# EAGLE board Vernier_Interface_Shield-Panel-v12 (EAGLE 6.6.0)
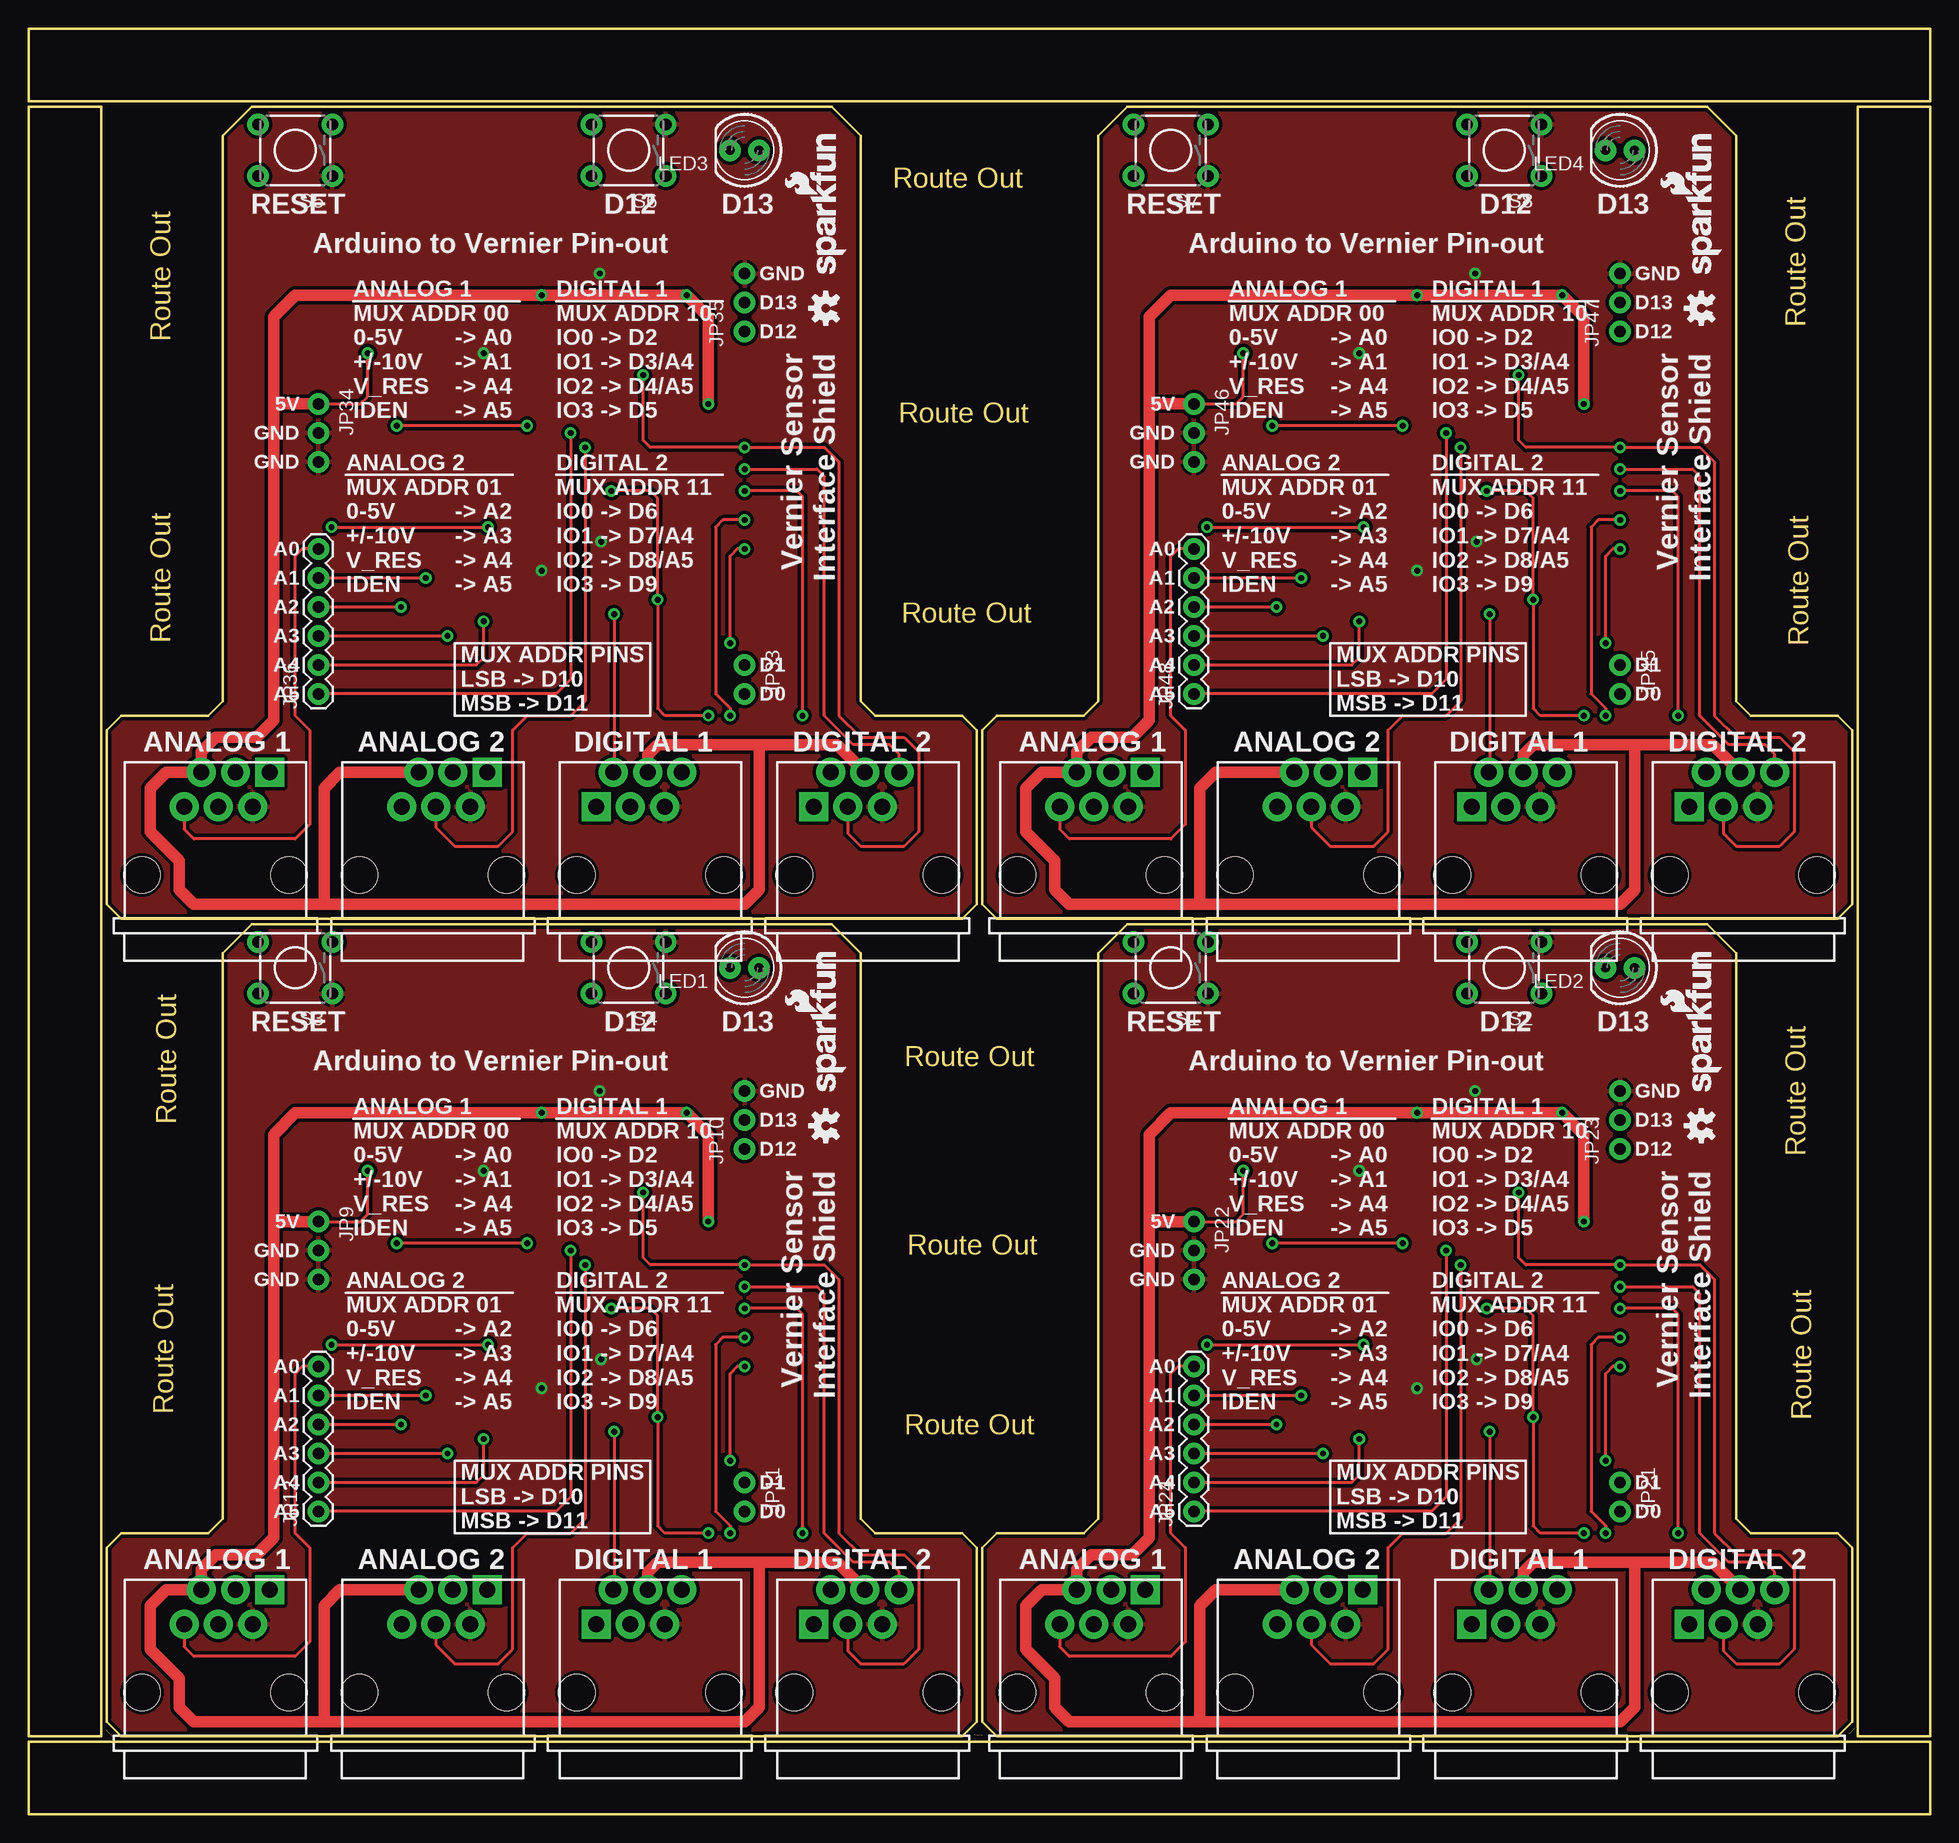
[diagram p0: board, top side]
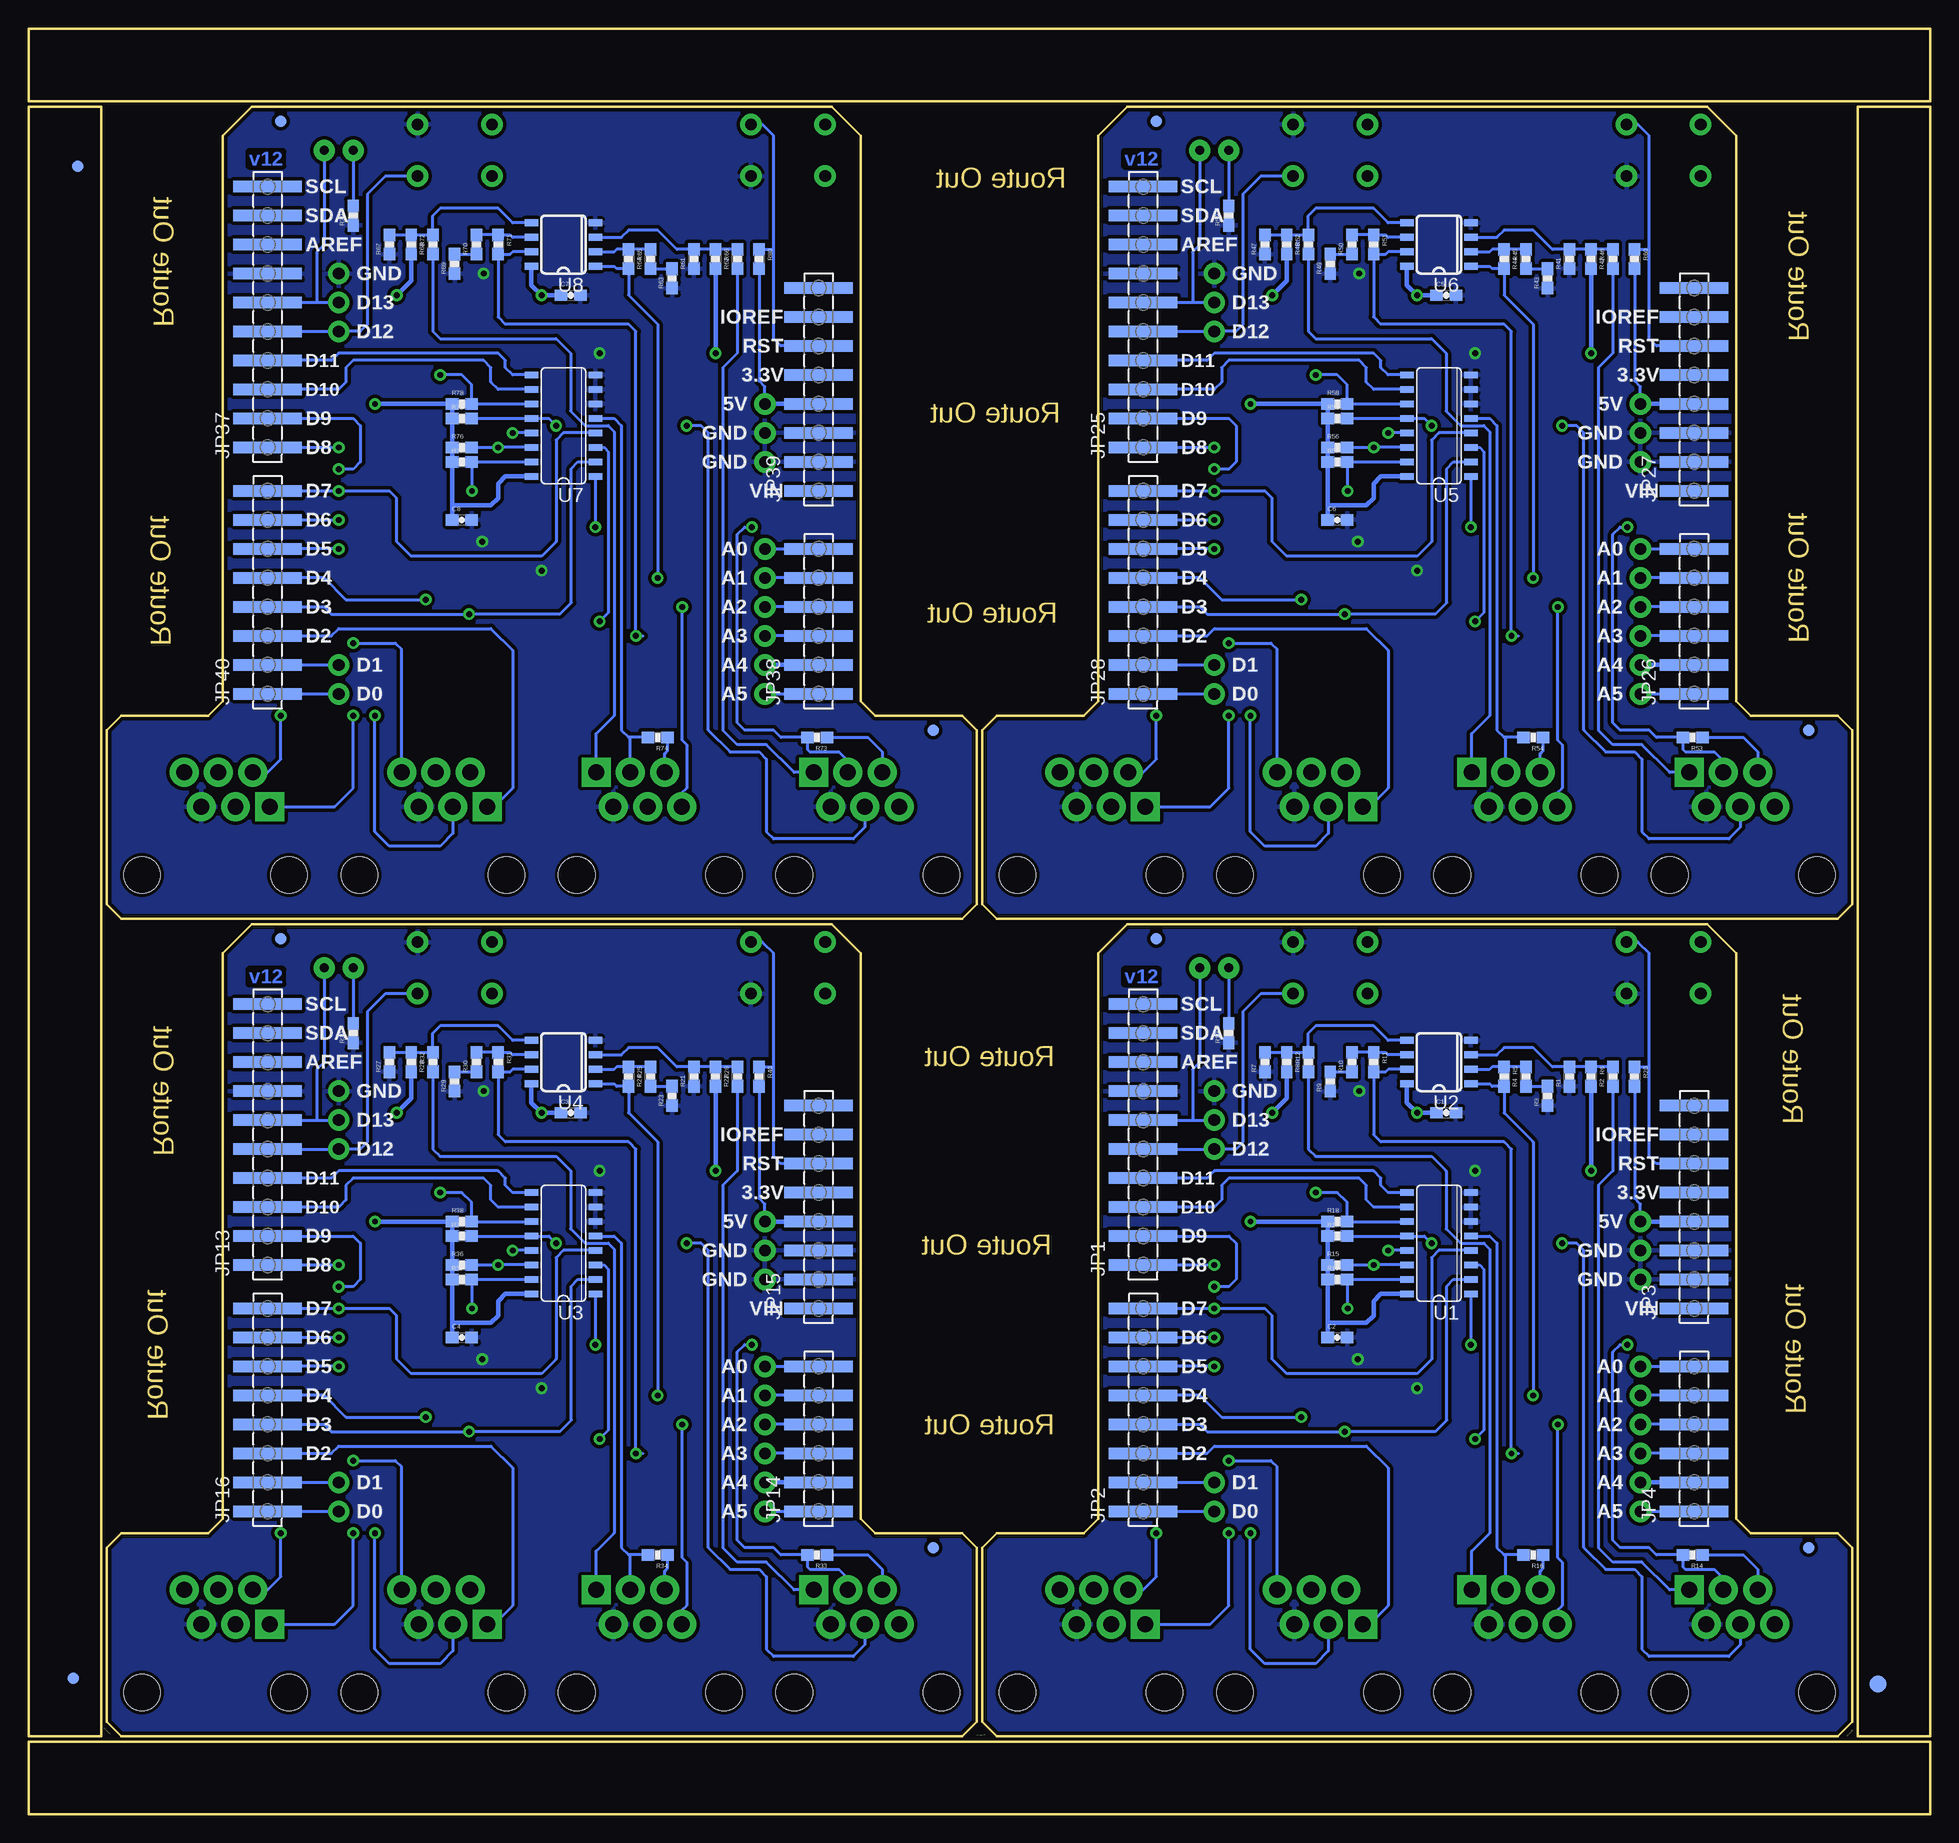
[diagram p1: board, bottom side, seen from below]

Size 166.62 x 156.46 mm. Coordinates in mm from the lower left corner, seen from the top.
Outline: 6.35,79.25 6.35,6.86 0,6.86 0,29.72
Outline: 166.62,79.25 166.62,6.86 160.27,6.86 160.27,29.72
Outline: 0,25.65 0,149.61 6.35,149.61 6.35,75.18
Outline: 160.27,25.4 160.27,149.61 166.62,149.61 166.62,74.93
Outline: 8.13,6.86 81.79,6.86 83.06,8.13 83.06,23.37 81.79,24.64 74.17,24.64 72.9,25.91 72.9,75.44 70.36,77.98 19.56,77.98 17.02,75.44 17.02,25.91 15.75,24.64 8.13,24.64 6.86,23.37 6.86,8.13 8.13,6.86
Outline: 84.84,6.86 158.5,6.86 159.77,8.13 159.77,23.37 158.5,24.64 150.88,24.64 149.61,25.91 149.61,75.44 147.07,77.98 96.27,77.98 93.73,75.44 93.73,25.91 92.46,24.64 84.84,24.64 83.57,23.37 83.57,8.13 84.84,6.86
Outline: 8.13,78.49 81.79,78.49 83.06,79.76 83.06,95 81.79,96.27 74.17,96.27 72.9,97.54 72.9,147.07 70.36,149.61 19.56,149.61 17.02,147.07 17.02,97.54 15.75,96.27 8.13,96.27 6.86,95 6.86,79.76 8.13,78.49
Outline: 84.84,78.49 158.5,78.49 159.77,79.76 159.77,95 158.5,96.27 150.88,96.27 149.61,97.54 149.61,147.07 147.07,149.61 96.27,149.61 93.73,147.07 93.73,97.54 92.46,96.27 84.84,96.27 83.57,95 83.57,79.76 84.84,78.49
Outline: 0,0 166.62,0 166.62,6.35 0,6.35 0,0
Outline: 0,156.46 0,150.11 166.62,150.11 166.62,156.46 0,156.46
Copper layers (1*16): Top 0.035mm / dielectric 1.5mm / Bottom 0.035mm
Design rules "SparkFun-2-layer": minimum track width 7mil, minimum drill 15mil, track to track 8mil, track to pad 8mil, pad to pad 8mil, via to via 8mil, smd to smd 8mil, copper to edge 8mil, drill to drill 8mil, minimum pad ring 12mil, minimum via ring 10mil, stop-mask expansion 4mil, vias tented up to drill 20mil, thermal gap 10mil

## Footprints (pad centres in the part's own frame; a part is rotated, then mirrored left to right if it is on the bottom)
0603-CAP = smd 1.1 x 1: 1 -0.85,0; 2 0.85,0
FIDUCIAL-1.5X3 = smd 1.5 x 1.5: 1 0,0
FIDUCIAL-1X2 = smd 1 x 1: 1 0,0
1X10_SMD_MALE = smd 1.02 x 6: 1 0,0; 2 2.54,0; 3 5.08,0; 4 7.62,0; 5 10.16,0; 6 12.7,0; 7 15.24,0; 8 17.78,0; 9 20.32,0; 10 22.86,0
1X08_SMD_MALE = smd 1.02 x 6: 1 0,0; 2 2.54,0; 3 5.08,0; 4 7.62,0; 5 10.16,0; 6 12.7,0; 7 15.24,0; 8 17.78,0
1X06_SMD_MALE = smd 1.02 x 6: 1 0,0; 2 2.54,0; 3 5.08,0; 4 7.62,0; 5 10.16,0; 6 12.7,0
BTA = drill 1.4 pad 2.54 square: 1 4.75,9 | drill 1.4 pad 2.54: 2 3.25,6; 3 1.75,9; 4 0.25,6; 5 -1.25,9; 6 -2.75,6 | hole 3.2: 6.45,0; -6.45,0
BTD = drill 1.4 pad 2.54 square: 1 -4.75,6 | drill 1.4 pad 2.54: 2 -3.25,9; 3 -1.75,6; 4 -0.25,9; 5 1.25,6; 6 2.75,9 | hole 3.2: 6.45,0; -6.45,0
1X03_NO_SILK = drill 1.016 pad 1.88: 1 0,0; 2 2.54,0; 3 5.08,0
1X02_NO_SILK = drill 1.016 pad 1.88: 1 0,0; 2 2.54,0
1X06 = drill 1.016 pad 1.88: 1 0,0; 2 2.54,0; 3 5.08,0; 4 7.62,0; 5 10.16,0; 6 12.7,0
LED5MM = drill 0.813 pad 1.88: A -1.27,0; K 1.27,0
0603-RES = smd 1.1 x 1: 1 -0.85,0; 2 0.85,0
TACTILE-PTH = drill 1.016 pad 1.88: 1 -3.251,2.261; 2 3.251,2.261; 3 -3.251,-2.261; 4 3.251,-2.261
SO16 = smd 0.6 x 1.2: 1 -4.445,-2.8; 2 -3.175,-2.8; 3 -1.905,-2.8; 4 -0.635,-2.8; 5 0.635,-2.8; 6 1.905,-2.8; 7 3.175,-2.8; 8 4.445,-2.8; 9 4.445,2.8; 10 3.175,2.8; 11 1.905,2.8; 12 0.635,2.8; 13 -0.635,2.8; 14 -1.905,2.8; 15 -3.175,2.8; 16 -4.445,2.8
SO08-TIGHT = smd 0.6 x 1.2: 1 -1.905,-2.8; 2 -0.635,-2.8; 3 0.635,-2.8; 4 1.905,-2.8; 5 1.905,2.8; 6 0.635,2.8; 7 -0.635,2.8; 8 -1.905,2.8

## Placement (x,y rotation side)
C1  0.1uF  [0603-CAP]  42.42,61.47 0 bottom
C2  0.1uF  [0603-CAP]  51.94,41.78 0 bottom
C3  0.1uF  [0603-CAP]  119.13,61.47 0 bottom
C4  0.1uF  [0603-CAP]  128.65,41.78 0 bottom
C5  0.1uF  [0603-CAP]  42.42,133.1 0 bottom
C6  0.1uF  [0603-CAP]  51.94,113.41 0 bottom
C7  0.1uF  [0603-CAP]  119.13,133.1 0 bottom
C8  0.1uF  [0603-CAP]  128.65,113.41 0 bottom
E$1  [FIDUCIAL-1.5X3]  4.57,11.43 0 bottom
E$4  [FIDUCIAL-1X2]  162.69,11.94 0 bottom
E$6  [FIDUCIAL-1X2]  162.31,144.4 90 bottom
FID1  FIDUCIAL1X2  [FIDUCIAL-1X2]  10.67,23.37 0 bottom
FID2  FIDUCIAL1X2  [FIDUCIAL-1X2]  67.82,76.71 0 bottom
FID3  FIDUCIAL1X2  [FIDUCIAL-1X2]  87.38,23.37 0 bottom
FID4  FIDUCIAL1X2  [FIDUCIAL-1X2]  144.53,76.71 0 bottom
FID5  FIDUCIAL1X2  [FIDUCIAL-1X2]  10.67,95 0 bottom
FID6  FIDUCIAL1X2  [FIDUCIAL-1X2]  67.82,148.34 0 bottom
FID7  FIDUCIAL1X2  [FIDUCIAL-1X2]  87.38,95 0 bottom
FID8  FIDUCIAL1X2  [FIDUCIAL-1X2]  144.53,148.34 0 bottom
JP1  Male  [1X10_SMD_MALE]  68.96,48.13 90 bottom
JP2  Male  [1X08_SMD_MALE]  68.96,26.54 90 bottom
JP3  Male  [1X08_SMD_MALE]  20.7,44.32 90 bottom
JP4  Male  [1X06_SMD_MALE]  20.7,26.54 90 bottom
JP5  BTA  [BTA]  16.38,10.67 0 top
JP6  BTA  [BTA]  35.43,10.67 0 top
JP7  BTD  [BTD]  54.48,10.67 0 top
JP8  BTD  [BTD]  73.53,10.67 0 top
JP9  [1X03_NO_SILK]  25.4,51.94 270 top
JP10  [1X03_NO_SILK]  62.74,58.29 90 top
JP11  M021X02_NO_SILK  [1X02_NO_SILK]  62.74,29.08 270 top
JP12  Male  [1X06]  25.4,26.54 90 top
JP13  Male  [1X10_SMD_MALE]  145.67,48.13 90 bottom
JP14  Male  [1X06_SMD_MALE]  97.41,26.54 90 bottom
JP15  Male  [1X08_SMD_MALE]  97.41,44.32 90 bottom
JP16  Male  [1X08_SMD_MALE]  145.67,26.54 90 bottom
JP17  BTD  [BTD]  131.19,10.67 0 top
JP18  BTA  [BTA]  93.09,10.67 0 top
JP19  BTA  [BTA]  112.14,10.67 0 top
JP20  BTD  [BTD]  150.24,10.67 0 top
JP21  M021X02_NO_SILK  [1X02_NO_SILK]  139.45,29.08 270 top
JP22  [1X03_NO_SILK]  102.11,51.94 270 top
JP23  [1X03_NO_SILK]  139.45,58.29 90 top
JP24  Male  [1X06]  102.11,26.54 90 top
JP25  Male  [1X10_SMD_MALE]  68.96,119.76 90 bottom
JP26  Male  [1X06_SMD_MALE]  20.7,98.17 90 bottom
JP27  Male  [1X08_SMD_MALE]  20.7,115.95 90 bottom
JP28  Male  [1X08_SMD_MALE]  68.96,98.17 90 bottom
JP29  BTD  [BTD]  54.48,82.3 0 top
JP30  BTA  [BTA]  16.38,82.3 0 top
JP31  BTA  [BTA]  35.43,82.3 0 top
JP32  BTD  [BTD]  73.53,82.3 0 top
JP33  M021X02_NO_SILK  [1X02_NO_SILK]  62.74,100.71 270 top
JP34  [1X03_NO_SILK]  25.4,123.57 270 top
JP35  [1X03_NO_SILK]  62.74,129.92 90 top
JP36  Male  [1X06]  25.4,98.17 90 top
JP37  Male  [1X10_SMD_MALE]  145.67,119.76 90 bottom
JP38  Male  [1X06_SMD_MALE]  97.41,98.17 90 bottom
JP39  Male  [1X08_SMD_MALE]  97.41,115.95 90 bottom
JP40  Male  [1X08_SMD_MALE]  145.67,98.17 90 bottom
JP41  BTD  [BTD]  131.19,82.3 0 top
JP42  BTA  [BTA]  93.09,82.3 0 top
JP43  BTA  [BTA]  112.14,82.3 0 top
JP44  BTD  [BTD]  150.24,82.3 0 top
JP45  M021X02_NO_SILK  [1X02_NO_SILK]  139.45,100.71 270 top
JP46  [1X03_NO_SILK]  102.11,123.57 270 top
JP47  [1X03_NO_SILK]  139.45,129.92 90 top
JP48  Male  [1X06]  102.11,98.17 90 top
LED1  [LED5MM]  62.74,74.17 180 top
LED2  [LED5MM]  139.45,74.17 180 top
LED3  [LED5MM]  62.74,145.8 180 top
LED4  [LED5MM]  139.45,145.8 180 top
LOGO1  OSHW-LOGOS  [OSHW-LOGO-S]  146.56,60.33 90 top
LOGO2  OSHW-LOGOS  [OSHW-LOGO-S]  69.85,60.33 90 top
LOGO3  OSHW-LOGOS  [OSHW-LOGO-S]  69.85,131.95 90 top
LOGO4  OSHW-LOGOS  [OSHW-LOGO-S]  146.56,131.95 90 top
LOGO_1  LOGO-SFESK  [SFE-LOGO-FLAME]  69.09,70.36 90 top
LOGO_2  LOGO-SFENW2  [SFE-NEW-WEB]  148.34,63.37 90 top
LOGO_3  LOGO-SFENW2  [SFE-NEW-WEB]  71.63,63.37 90 top
LOGO_4  LOGO-SFESK  [SFE-LOGO-FLAME]  145.8,70.36 90 top
LOGO_5  LOGO-SFENW2  [SFE-NEW-WEB]  71.63,135 90 top
LOGO_6  LOGO-SFESK  [SFE-LOGO-FLAME]  69.09,141.99 90 top
LOGO_7  LOGO-SFENW2  [SFE-NEW-WEB]  148.34,135 90 top
LOGO_8  LOGO-SFESK  [SFE-LOGO-FLAME]  145.8,141.99 90 top
R1  10K  [0603-RES]  31.62,64.64 90 bottom
R2  20k  [0603-RES]  27.81,64.64 90 bottom
R3  20k  [0603-RES]  33.53,62.94 90 bottom
R4  20k  [0603-RES]  35.43,64.64 90 bottom
R5  10K  [0603-RES]  37.34,64.64 270 bottom
R6  10K  [0603-RES]  29.72,64.64 270 bottom
R7  10K  [0603-RES]  58.29,65.91 90 bottom
R8  20k  [0603-RES]  54.48,65.91 90 bottom
R9  20k  [0603-RES]  52.58,64.21 90 bottom
R10  20k  [0603-RES]  50.67,65.91 90 bottom
R11  10K  [0603-RES]  48.77,65.91 270 bottom
R12  10K  [0603-RES]  56.39,65.91 270 bottom
R13  10K  [0603-RES]  51.94,50.67 0 bottom
R14  15K  [0603-RES]  20.83,22.73 180 bottom
R15  10K  [0603-RES]  51.94,48.13 0 bottom
R16  15K  [0603-RES]  34.8,22.73 180 bottom
R17  10K  [0603-RES]  51.94,46.86 0 bottom
R18  10K  [0603-RES]  51.94,51.94 0 bottom
R19  330  [0603-RES]  61.47,68.45 90 bottom
R20  10K  [0603-RES]  25.91,64.64 270 bottom
R21  10K  [0603-RES]  108.33,64.64 90 bottom
R22  20k  [0603-RES]  104.52,64.64 90 bottom
R23  20k  [0603-RES]  110.24,62.94 90 bottom
R24  20k  [0603-RES]  112.14,64.64 90 bottom
R25  10K  [0603-RES]  114.05,64.64 270 bottom
R26  10K  [0603-RES]  106.43,64.64 270 bottom
R27  10K  [0603-RES]  135,65.91 90 bottom
R28  20k  [0603-RES]  131.19,65.91 90 bottom
R29  20k  [0603-RES]  129.29,64.21 90 bottom
R30  20k  [0603-RES]  127.38,65.91 90 bottom
R31  10K  [0603-RES]  125.48,65.91 270 bottom
R32  10K  [0603-RES]  133.1,65.91 270 bottom
R33  15K  [0603-RES]  97.54,22.73 180 bottom
R34  15K  [0603-RES]  111.51,22.73 180 bottom
R35  10K  [0603-RES]  128.65,50.67 0 bottom
R36  10K  [0603-RES]  128.65,48.13 0 bottom
R37  10K  [0603-RES]  128.65,46.86 0 bottom
R38  10K  [0603-RES]  128.65,51.94 0 bottom
R39  330  [0603-RES]  138.18,68.45 90 bottom
R40  10K  [0603-RES]  102.62,64.64 270 bottom
R41  10K  [0603-RES]  31.62,136.27 90 bottom
R42  20k  [0603-RES]  27.81,136.27 90 bottom
R43  20k  [0603-RES]  33.53,134.57 90 bottom
R44  20k  [0603-RES]  35.43,136.27 90 bottom
R45  10K  [0603-RES]  37.34,136.27 270 bottom
R46  10K  [0603-RES]  29.72,136.27 270 bottom
R47  10K  [0603-RES]  58.29,137.54 90 bottom
R48  20k  [0603-RES]  54.48,137.54 90 bottom
R49  20k  [0603-RES]  52.58,135.84 90 bottom
R50  20k  [0603-RES]  50.67,137.54 90 bottom
R51  10K  [0603-RES]  48.77,137.54 270 bottom
R52  10K  [0603-RES]  56.39,137.54 270 bottom
R53  15K  [0603-RES]  20.83,94.36 180 bottom
R54  15K  [0603-RES]  34.8,94.36 180 bottom
R55  10K  [0603-RES]  51.94,122.3 0 bottom
R56  10K  [0603-RES]  51.94,119.76 0 bottom
R57  10K  [0603-RES]  51.94,118.49 0 bottom
R58  10K  [0603-RES]  51.94,123.57 0 bottom
R59  330  [0603-RES]  61.47,140.08 90 bottom
R60  10K  [0603-RES]  25.91,136.27 270 bottom
R61  10K  [0603-RES]  108.33,136.27 90 bottom
R62  20k  [0603-RES]  104.52,136.27 90 bottom
R63  20k  [0603-RES]  110.24,134.57 90 bottom
R64  20k  [0603-RES]  112.14,136.27 90 bottom
R65  10K  [0603-RES]  114.05,136.27 270 bottom
R66  10K  [0603-RES]  106.43,136.27 270 bottom
R67  10K  [0603-RES]  135,137.54 90 bottom
R68  20k  [0603-RES]  131.19,137.54 90 bottom
R69  20k  [0603-RES]  129.29,135.84 90 bottom
R70  20k  [0603-RES]  127.38,137.54 90 bottom
R71  10K  [0603-RES]  125.48,137.54 270 bottom
R72  10K  [0603-RES]  133.1,137.54 270 bottom
R73  15K  [0603-RES]  97.54,94.36 180 bottom
R74  15K  [0603-RES]  111.51,94.36 180 bottom
R75  10K  [0603-RES]  128.65,122.3 0 bottom
R76  10K  [0603-RES]  128.65,119.76 0 bottom
R77  10K  [0603-RES]  128.65,118.49 0 bottom
R78  10K  [0603-RES]  128.65,123.57 0 bottom
R79  330  [0603-RES]  138.18,140.08 90 bottom
R80  10K  [0603-RES]  102.62,136.27 270 bottom
S1  Reset  [TACTILE-PTH]  100.08,74.17 180 top
S2  D12  [TACTILE-PTH]  129.29,74.17 180 top
S3  Reset  [TACTILE-PTH]  23.37,74.17 180 top
S4  D12  [TACTILE-PTH]  52.58,74.17 180 top
S5  Reset  [TACTILE-PTH]  23.37,145.8 180 top
S6  D12  [TACTILE-PTH]  52.58,145.8 180 top
S7  Reset  [TACTILE-PTH]  100.08,145.8 180 top
S8  D12  [TACTILE-PTH]  129.29,145.8 180 top
U1  74HC4052SO  [SO16]  43.05,50.04 90 bottom
U2  LMV358SOICT  [SO08-TIGHT]  43.05,65.91 90 bottom
U3  74HC4052SO  [SO16]  119.76,50.04 90 bottom
U4  LMV358SOICT  [SO08-TIGHT]  119.76,65.91 90 bottom
U5  74HC4052SO  [SO16]  43.05,121.67 90 bottom
U6  LMV358SOICT  [SO08-TIGHT]  43.05,137.54 90 bottom
U7  74HC4052SO  [SO16]  119.76,121.67 90 bottom
U8  LMV358SOICT  [SO08-TIGHT]  119.76,137.54 90 bottom

## Library data of the parts
C1-C8 = SparkFun-Capacitors; PROD_ID: CAP-00810
E$1 = SparkFun-Retired
E$4 E$6 FID1-FID8 LOGO1-LOGO4 LOGO_1-LOGO_8 = SparkFun-Aesthetics
JP1 JP13 JP25 JP37 = SparkFun-Connectors; PROD_ID: CONN-11291
JP2 JP3 JP15 JP16 JP27 JP28 JP39 JP40 = SparkFun-Connectors; PROD_ID: CONN-11292
JP4 JP14 JP26 JP38 = SparkFun-Connectors; PROD_ID: CONN-11293
JP5-JP12 JP17-JP24 JP29-JP36 JP41-JP48 = SparkFun-Connectors
LED1-LED4 = SparkFun-LED
R1 R5-R7 R11-R13 R15 R17 R18 R20 R21 R25-R27 R31 R32 R35-R38 R40 R41 R45-R47 R51 R52 R55-R58 R60 R61 R65-R67 R71 R72 R75-R78 R80 = SparkFun-Resistors; PROD_ID: RES-00824
R2-R4 R8-R10 R22-R24 R28-R30 R42-R44 R48-R50 R62-R64 R68-R70 = SparkFun-Resistors; PROD_ID: RES-09383
R14 R16 R33 R34 R53 R54 R73 R74 = SparkFun-Resistors; PROD_ID: RES-07854
R19 R39 R59 R79 = SparkFun-Resistors; PROD_ID: RES-00818
S1-S8 = SparkFun-Electromechanical
U1 U3 U5 U7 = SparkFun-AnalogIC; PROD_ID: IC-09813
U2 U4 U6 U8 = SparkFun-AnalogIC; PROD_ID: IC-09657

## Nets
0: JP2.1 JP11.2
1: JP2.2 JP11.1
2: JP13.5 JP23.1 S2.1
3: JP16.1 JP21.2
3.3V: JP3.5
3.3V1: JP15.5
3.3V2: JP27.5
3.3V3: JP39.5
4: JP16.2 JP21.1
5: JP13.6 JP23.2 LED2.A
5V: C1.1 C2.1 JP3.4 JP5.5 JP6.5 JP7.4 JP8.4 JP9.1 R6.2 R12.2 R13.1 R14.1 R15.1 R16.1 R17.1 R18.1 R20.2 U1.16 U2.8
5V1: C3.1 C4.1 JP15.4 JP17.4 JP18.5 JP19.5 JP20.4 JP22.1 R26.2 R32.2 R33.1 R34.1 R35.1 R36.1 R37.1 R38.1 R40.2 U3.16 U4.8
5V2: C5.1 C6.1 JP27.4 JP29.4 JP30.5 JP31.5 JP32.4 JP34.1 R46.2 R52.2 R53.1 R54.1 R55.1 R56.1 R57.1 R58.1 R60.2 U5.16 U6.8
5V3: C7.1 C8.1 JP39.4 JP41.4 JP42.5 JP43.5 JP44.4 JP46.1 R66.2 R72.2 R73.1 R74.1 R75.1 R76.1 R77.1 R78.1 R80.2 U7.16 U8.8
6: JP25.5 JP35.1 S6.1
7: JP28.1 JP33.2
8: JP28.2 JP33.1
9: JP25.6 JP35.2 LED3.A
10: JP37.5 JP47.1 S8.1
11: JP40.1 JP45.2
12: JP1.5 JP10.1 S4.1
13: JP1.6 JP10.2 LED1.A
14: JP40.2 JP45.1
15: JP37.6 JP47.2 LED4.A
A1: JP4.5 JP12.5 R5.2 U2.1
A2: JP14.2 JP24.2 U3.3
A3: JP4.3 JP12.3 R11.2 U2.7
A4: JP4.2 JP12.2 U1.3
A5: JP4.1 JP12.1 U1.13
A6: JP14.1 JP24.1 U3.13
A7: JP14.5 JP24.5 R25.2 U4.1
A8: JP14.3 JP24.3 R31.2 U4.7
A9: JP26.2 JP36.2 U5.3
A10: JP26.1 JP36.1 U5.13
A11: JP26.5 JP36.5 R45.2 U6.1
A12: JP26.3 JP36.3 R51.2 U6.7
A13: JP38.2 JP48.2 U7.3
A14: JP38.1 JP48.1 U7.13
A15: JP38.5 JP48.5 R65.2 U8.1
A16: JP38.3 JP48.3 R71.2 U8.7
AREF: JP1.8
AREF1: JP13.8
AREF2: JP25.8
AREF3: JP37.8
AS1_AN1: JP5.1 R2.1
AS1_AN2: JP4.6 JP5.6 JP12.6
AS1_AN3: JP18.1 R22.1
AS1_AN4: JP14.6 JP18.6 JP24.6
AS1_AN5: JP30.1 R42.1
AS1_AN6: JP26.6 JP30.6 JP36.6
AS1_AN7: JP42.1 R62.1
AS1_AN8: JP38.6 JP42.6 JP48.6
AS1_AUTOID: JP5.4 R13.2 U1.12
AS1_AUTOID1: JP18.4 R35.2 U3.12
AS1_AUTOID2: JP30.4 R55.2 U5.12
AS1_AUTOID3: JP42.4 R75.2 U7.12
AS1_VRES: JP5.3 R14.2 U1.1
AS1_VRES1: JP18.3 R33.2 U3.1
AS1_VRES2: JP30.3 R53.2 U5.1
AS1_VRES3: JP42.3 R73.2 U7.1
AS2_AN1: JP6.1 R8.1
AS2_AN2: JP4.4 JP6.6 JP12.4
AS2_AN3: JP14.4 JP19.6 JP24.4
AS2_AN4: JP19.1 R28.1
AS2_AN5: JP26.4 JP31.6 JP36.4
AS2_AN6: JP31.1 R48.1
AS2_AN7: JP38.4 JP43.6 JP48.4
AS2_AN8: JP43.1 R68.1
AS2_AUTOID: JP6.4 R15.2 U1.14
AS2_AUTOID1: JP19.4 R36.2 U3.14
AS2_AUTOID2: JP31.4 R56.2 U5.14
AS2_AUTOID3: JP43.4 R76.2 U7.14
AS2_VRES: JP6.3 R16.2 U1.5
AS2_VRES1: JP19.3 R34.2 U3.5
AS2_VRES2: JP31.3 R54.2 U5.5
AS2_VRES3: JP43.3 R74.2 U7.5
D1_IO0: JP2.3 JP7.1
D1_IO1: JP2.4 JP7.2 U1.2
D1_IO2: JP2.5 JP7.3 R17.2 U1.15
D1_IO3: JP2.6 JP7.6
D1_IO4: JP16.6 JP17.6
D1_IO5: JP16.5 JP17.3 R37.2 U3.15
D1_IO6: JP16.4 JP17.2 U3.2
D1_IO7: JP16.3 JP17.1
D1_IO8: JP28.6 JP29.6
D1_IO9: JP28.5 JP29.3 R57.2 U5.15
D1_IO10: JP28.4 JP29.2 U5.2
D1_IO11: JP28.3 JP29.1
D1_IO12: JP40.6 JP41.6
D1_IO13: JP40.5 JP41.3 R77.2 U7.15
D1_IO14: JP40.4 JP41.2 U7.2
D1_IO15: JP40.3 JP41.1
D2_IO0: JP2.7 JP8.1
D2_IO1: JP2.8 JP8.2 U1.4
D2_IO2: JP1.1 JP8.3 R18.2 U1.11
D2_IO3: JP1.2 JP8.6
D2_IO4: JP13.2 JP20.6
D2_IO5: JP13.1 JP20.3 R38.2 U3.11
D2_IO6: JP16.8 JP20.2 U3.4
D2_IO7: JP16.7 JP20.1
D2_IO8: JP25.2 JP32.6
D2_IO9: JP25.1 JP32.3 R58.2 U5.11
D2_IO10: JP28.8 JP32.2 U5.4
D2_IO11: JP28.7 JP32.1
D2_IO12: JP37.2 JP44.6
D2_IO13: JP37.1 JP44.3 R78.2 U7.11
D2_IO14: JP40.8 JP44.2 U7.4
D2_IO15: JP40.7 JP44.1
GND: C1.2 C2.2 JP1.7 JP3.2 JP3.3 JP5.2 JP6.2 JP7.5 JP8.5 JP9.2 JP9.3 JP10.3 R1.1 R3.1 R7.1 R9.1 R19.1 S3.1 S4.3 U1.6 U1.7 U1.8 U2.4
GND1: C3.2 C4.2 JP13.7 JP15.2 JP15.3 JP17.5 JP18.2 JP19.2 JP20.5 JP22.2 JP22.3 JP23.3 R21.1 R23.1 R27.1 R29.1 R39.1 S1.1 S2.3 U3.6 U3.7 U3.8 U4.4
GND2: C5.2 C6.2 JP25.7 JP27.2 JP27.3 JP29.5 JP30.2 JP31.2 JP32.5 JP34.2 JP34.3 JP35.3 R41.1 R43.1 R47.1 R49.1 R59.1 S5.1 S6.3 U5.6 U5.7 U5.8 U6.4
GND3: C7.2 C8.2 JP37.7 JP39.2 JP39.3 JP41.5 JP42.2 JP43.2 JP44.5 JP46.2 JP46.3 JP47.3 R61.1 R63.1 R67.1 R69.1 R79.1 S7.1 S8.3 U7.6 U7.7 U7.8 U8.4
IOREF: JP3.7
IOREF1: JP15.7
IOREF2: JP27.7
IOREF3: JP39.7
MUX_A0: JP1.3 U1.10
MUX_A1: JP1.4 U1.9
MUX_A2: JP13.3 U3.10
MUX_A3: JP13.4 U3.9
MUX_A4: JP25.3 U5.10
MUX_A5: JP25.4 U5.9
MUX_A6: JP37.3 U7.10
MUX_A7: JP37.4 U7.9
N$1: R1.2 R2.2 R6.1 U2.3
N$2: R3.2 R4.1
N$3: R4.2 R5.1 U2.2
N$4: R23.2 R24.1
N$5: R9.2 R10.1
N$6: R7.2 R8.2 R12.1 U2.5
N$8: R10.2 R11.1 U2.6
N$9: LED1.K R19.2
N$24: R21.2 R22.2 R26.1 U4.3
N$25: R24.2 R25.1 U4.2
N$26: R29.2 R30.1
N$28: R27.2 R28.2 R32.1 U4.5
N$29: R30.2 R31.1 U4.6
N$30: LED2.K R39.2
N$31: R43.2 R44.1
N$32: R41.2 R42.2 R46.1 U6.3
N$33: R44.2 R45.1 U6.2
N$34: R49.2 R50.1
N$35: R47.2 R48.2 R52.1 U6.5
N$36: R50.2 R51.1 U6.6
N$37: LED3.K R59.2
N$38: R63.2 R64.1
N$39: R61.2 R62.2 R66.1 U8.3
N$40: R64.2 R65.1 U8.2
N$41: R69.2 R70.1
N$42: R67.2 R68.2 R72.1 U8.5
N$43: R70.2 R71.1 U8.6
N$44: LED4.K R79.2
RESET: JP3.6 R20.1 S3.3
RESET1: JP15.6 R40.1 S1.3
RESET2: JP27.6 R60.1 S5.3
RESET3: JP39.6 R80.1 S7.3
SCL: JP1.10
SCL1: JP13.10
SCL2: JP25.10
SCL3: JP37.10
SDA: JP1.9
SDA1: JP13.9
SDA2: JP25.9
SDA3: JP37.9
VIN: JP3.1
VIN1: JP15.1
VIN2: JP27.1
VIN3: JP39.1

## Tracks (layer width: path | path; a pad name or v marks a point on that pad's centre or on a via)
0
  Bottom 0.254: JP2.1 JP11.2
1
  Bottom 0.254: JP2.2 JP11.1
2
  Bottom 0.254: JP13.5 JP23.1 137.54,58.29 136.91,58.93 136.91,70.36 135.36,71.91 S2.1
3
  Bottom 0.254: JP16.1 JP21.2
4
  Bottom 0.254: JP16.2 JP21.1
5
  Bottom 0.254: JP13.6 141.35,60.83 | 141.35,60.83 JP23.2 | LED2.A 140.72,65.91 141.35,65.28 141.35,60.83
5V  (via drill 0.51)
  Top 0.254: JP9.1 29.08,51.94 29.72,52.58 v29.72,56.39
  Top 1.016: 21.46,51.94 JP9.1 | 64.01,22.1 55.12,22.1 54.23,21.21 JP7.4 | 64.01,22.1 70.85,22.1 JP8.4 | JP6.5 27.29,19.67 25.91,18.29 25.91,8.13 | 25.91,8.13 14.48,8.13 13.21,9.4 13.21,11.94 10.67,14.48 10.67,18.29 12.05,19.67 JP5.5 15.13,21.48 16.38,22.73 R14.1 21.46,24.22 21.46,51.94 | 25.91,8.13 62.74,8.13 64.01,9.4 64.01,22.1 | 21.46,51.94 21.46,59.56 23.37,61.47 v44.96,61.47 v57.66,61.47 59.56,59.56 v59.56,51.94
  Bottom 0.254: R14.1 16.38,22.73 15.13,21.48 JP5.5 | JP6.5 34.18,21.32 33.95,21.55 R16.1 | R20.2 25.91,53.98 25.4,53.47 JP9.1
  Bottom 0.406: 52.79,43.05 R17.1 R15.1 R13.1 R18.1 v59.56,51.94 | 52.79,43.05 C2.1 | U1.16 48.13,45.59 48.77,44.96 48.77,43.69 49.4,43.05 52.79,43.05 | R6.2 v29.72,56.39 | C1.1 v44.96,61.47 45.85,62.36 U2.8 | JP3.4 JP9.1 | R12.2 56.39,62.74 v57.66,61.47
5V1  (via drill 0.51)
  Top 0.254: JP22.1 105.79,51.94 106.43,52.58 v106.43,56.39
  Top 1.016: 98.17,51.94 JP22.1 | 140.72,22.1 131.83,22.1 130.94,21.21 JP17.4 | 140.72,22.1 147.56,22.1 JP20.4 | JP19.5 104,19.67 102.62,18.29 102.62,8.13 | 102.62,8.13 91.19,8.13 89.92,9.4 89.92,11.94 87.38,14.48 87.38,18.29 88.76,19.67 JP18.5 91.84,21.48 93.09,22.73 R33.1 98.17,24.22 98.17,51.94 | 102.62,8.13 139.45,8.13 140.72,9.4 140.72,22.1 | 98.17,51.94 98.17,59.56 100.08,61.47 v121.67,61.47 v134.37,61.47 136.27,59.56 v136.27,51.94
  Bottom 0.254: R33.1 93.09,22.73 91.84,21.48 JP18.5 | JP19.5 110.89,21.32 110.66,21.55 R34.1 | R40.2 102.62,53.98 102.11,53.47 JP22.1
  Bottom 0.406: 129.5,43.05 R37.1 R36.1 R35.1 R38.1 v136.27,51.94 | 129.5,43.05 C4.1 | U3.16 124.84,45.59 125.48,44.96 125.48,43.69 126.11,43.05 129.5,43.05 | R26.2 v106.43,56.39 | C3.1 v121.67,61.47 122.56,62.36 U4.8 | JP15.4 JP22.1 | R32.2 133.1,62.74 v134.37,61.47
5V2  (via drill 0.51)
  Top 0.254: JP34.1 29.08,123.57 29.72,124.21 v29.72,128.02
  Top 1.016: 21.46,123.57 JP34.1 | 64.01,93.73 55.12,93.73 54.23,92.84 JP29.4 | 64.01,93.73 70.85,93.73 JP32.4 | JP31.5 27.29,91.3 25.91,89.92 25.91,79.76 | 25.91,79.76 14.48,79.76 13.21,81.03 13.21,83.57 10.67,86.11 10.67,89.92 12.05,91.3 JP30.5 15.13,93.11 16.38,94.36 R53.1 21.46,95.85 21.46,123.57 | 25.91,79.76 62.74,79.76 64.01,81.03 64.01,93.73 | 21.46,123.57 21.46,131.19 23.37,133.1 v44.96,133.1 v57.66,133.1 59.56,131.19 v59.56,123.57
  Bottom 0.254: R53.1 16.38,94.36 15.13,93.11 JP30.5 | JP31.5 34.18,92.94 33.95,93.18 R54.1 | R60.2 25.91,125.6 25.4,125.09 JP34.1
  Bottom 0.406: 52.79,114.68 R57.1 R56.1 R55.1 R58.1 v59.56,123.57 | 52.79,114.68 C6.1 | U5.16 48.13,117.22 48.77,116.59 48.77,115.32 49.4,114.68 52.79,114.68 | R46.2 v29.72,128.02 | C5.1 v44.96,133.1 45.85,133.99 U6.8 | JP27.4 JP34.1 | R52.2 56.39,134.37 v57.66,133.1
5V3  (via drill 0.51)
  Top 0.254: JP46.1 105.79,123.57 106.43,124.21 v106.43,128.02
  Top 1.016: 98.17,123.57 JP46.1 | 140.72,93.73 131.83,93.73 130.94,92.84 JP41.4 | 140.72,93.73 147.56,93.73 JP44.4 | JP43.5 104,91.3 102.62,89.92 102.62,79.76 | 102.62,79.76 91.19,79.76 89.92,81.03 89.92,83.57 87.38,86.11 87.38,89.92 88.76,91.3 JP42.5 91.84,93.11 93.09,94.36 R73.1 98.17,95.85 98.17,123.57 | 102.62,79.76 139.45,79.76 140.72,81.03 140.72,93.73 | 98.17,123.57 98.17,131.19 100.08,133.1 v121.67,133.1 v134.37,133.1 136.27,131.19 v136.27,123.57
  Bottom 0.254: R73.1 93.09,94.36 91.84,93.11 JP42.5 | JP43.5 110.89,92.94 110.66,93.18 R74.1 | R80.2 102.62,125.6 102.11,125.09 JP46.1
  Bottom 0.406: 129.5,114.68 R77.1 R76.1 R75.1 R78.1 v136.27,123.57 | 129.5,114.68 C8.1 | U7.16 124.84,117.22 125.48,116.59 125.48,115.32 126.11,114.68 129.5,114.68 | R66.2 v106.43,128.02 | C7.1 v121.67,133.1 122.56,133.99 U8.8 | JP39.4 JP46.1 | R72.2 133.1,134.37 v134.37,133.1
6
  Bottom 0.254: JP25.5 JP35.1 60.83,129.92 60.2,130.56 60.2,141.99 58.65,143.53 S6.1
7
  Bottom 0.254: JP28.1 JP33.2
8
  Bottom 0.254: JP28.2 JP33.1
9
  Bottom 0.254: JP25.6 64.64,132.46 | 64.64,132.46 JP35.2 | LED3.A 64.01,137.54 64.64,136.91 64.64,132.46
10
  Bottom 0.254: JP37.5 JP47.1 137.54,129.92 136.91,130.56 136.91,141.99 135.36,143.53 S8.1
11
  Bottom 0.254: JP40.1 JP45.2
12
  Bottom 0.254: JP1.5 JP10.1 60.83,58.29 60.2,58.93 60.2,70.36 58.65,71.91 S4.1
13
  Bottom 0.254: JP1.6 64.64,60.83 | 64.64,60.83 JP10.2 | LED1.A 64.01,65.91 64.64,65.28 64.64,60.83
14
  Bottom 0.254: JP40.2 JP45.1
15
  Bottom 0.254: JP37.6 141.35,132.46 | 141.35,132.46 JP47.2 | LED4.A 140.72,137.54 141.35,136.91 141.35,132.46
A1  (via drill 0.51)
  Top 0.254: JP12.5 v34.8,36.7
  Bottom 0.254: v34.8,36.7 34.8,58.93 37.34,61.47 R5.2 38.39,63.79 38.61,64.01 U2.1 | JP4.5 JP12.5
A2  (via drill 0.51)
  Top 0.254: JP24.2 115.95,29.08 116.59,29.72 v116.59,32.89
  Bottom 0.254: U3.3 116.2,48.13 115.82,47.75 115.82,33.66 v116.59,32.89
  Bottom 0.406: JP24.2 JP14.2
A3  (via drill 0.51)
  Top 0.254: JP12.3 v36.7,31.62
  Bottom 0.254: U2.7 47.5,65.28 47.71,65.06 R11.2 48.77,59.56 48.13,58.93 37.34,58.93 36.7,58.29 v36.7,31.62 36.07,31.62 | JP4.3 JP12.3
A4  (via drill 0.51)
  Top 0.254: JP12.2 39.24,29.08 39.88,29.72 v39.88,32.89
  Bottom 0.254: U1.3 39.5,48.13 39.12,47.75 39.12,33.66 v39.88,32.89
  Bottom 0.406: JP12.2 JP4.2
A5  (via drill 0.51)
  Top 0.254: v47.5,49.4 47.5,27.81 46.23,26.54 JP12.1
  Bottom 0.254: U1.13 v47.5,49.4 | JP12.1 JP4.1
A6  (via drill 0.51)
  Top 0.254: v124.21,49.4 124.21,27.81 122.94,26.54 JP24.1
  Bottom 0.254: U3.13 v124.21,49.4 | JP24.1 JP14.1
A7  (via drill 0.51)
  Top 0.254: JP24.5 v111.51,36.7
  Bottom 0.254: v111.51,36.7 111.51,58.93 114.05,61.47 R25.2 115.1,63.79 115.32,64.01 U4.1 | JP14.5 JP24.5
A8  (via drill 0.51)
  Top 0.254: JP24.3 v113.41,31.62
  Bottom 0.254: U4.7 124.21,65.28 124.42,65.06 R31.2 125.48,59.56 124.84,58.93 114.05,58.93 113.41,58.29 v113.41,31.62 112.78,31.62 | JP14.3 JP24.3
A9  (via drill 0.51)
  Top 0.254: JP36.2 39.24,100.71 39.88,101.35 v39.88,104.52
  Bottom 0.254: U5.3 39.5,119.76 39.12,119.38 39.12,105.28 v39.88,104.52
  Bottom 0.406: JP36.2 JP26.2
A10  (via drill 0.51)
  Top 0.254: v47.5,121.03 47.5,99.44 46.23,98.17 JP36.1
  Bottom 0.254: U5.13 v47.5,121.03 | JP36.1 JP26.1
A11  (via drill 0.51)
  Top 0.254: JP36.5 v34.8,108.33
  Bottom 0.254: v34.8,108.33 34.8,130.56 37.34,133.1 R45.2 38.39,135.42 38.61,135.64 U6.1 | JP26.5 JP36.5
A12  (via drill 0.51)
  Top 0.254: JP36.3 v36.7,103.25
  Bottom 0.254: U6.7 47.5,136.91 47.71,136.69 R51.2 48.77,131.19 48.13,130.56 37.34,130.56 36.7,129.92 v36.7,103.25 36.07,103.25 | JP26.3 JP36.3
A13  (via drill 0.51)
  Top 0.254: JP48.2 115.95,100.71 116.59,101.35 v116.59,104.52
  Bottom 0.254: U7.3 116.2,119.76 115.82,119.38 115.82,105.28 v116.59,104.52
  Bottom 0.406: JP48.2 JP38.2
A14  (via drill 0.51)
  Top 0.254: v124.21,121.03 124.21,99.44 122.94,98.17 JP48.1
  Bottom 0.254: U7.13 v124.21,121.03 | JP48.1 JP38.1
A15  (via drill 0.51)
  Top 0.254: JP48.5 v111.51,108.33
  Bottom 0.254: v111.51,108.33 111.51,130.56 114.05,133.1 R65.2 115.1,135.42 115.32,135.64 U8.1 | JP38.5 JP48.5
A16  (via drill 0.51)
  Top 0.254: JP48.3 v113.41,103.25
  Bottom 0.254: U8.7 124.21,136.91 124.42,136.69 R71.2 125.48,131.19 124.84,130.56 114.05,130.56 113.41,129.92 v113.41,103.25 112.78,103.25 | JP38.3 JP48.3
AS1_AN1
  Bottom 0.254: R2.1 27.81,56.39 29.08,55.12 29.08,23.37 27.81,22.1 25.27,22.1 22.84,19.67 JP5.1
AS1_AN2
  Top 0.254: JP5.6 13.63,14.69 14.48,13.84 23.37,13.84 24.64,15.11 24.64,23.37 23.37,24.64 23.37,38.61 24,39.24 JP12.6
  Bottom 0.254: JP12.6 JP4.6
AS1_AN3
  Bottom 0.254: R22.1 104.52,56.39 105.79,55.12 105.79,23.37 104.52,22.1 101.98,22.1 99.55,19.67 JP18.1
AS1_AN4
  Top 0.254: JP18.6 90.34,14.69 91.19,13.84 100.08,13.84 101.35,15.11 101.35,23.37 100.08,24.64 100.08,38.61 100.71,39.24 JP24.6
  Bottom 0.254: JP24.6 JP14.6
AS1_AN5
  Bottom 0.254: R42.1 27.81,128.02 29.08,126.75 29.08,95 27.81,93.73 25.27,93.73 22.84,91.3 JP30.1
AS1_AN6
  Top 0.254: JP30.6 13.63,86.32 14.48,85.47 23.37,85.47 24.64,86.74 24.64,95 23.37,96.27 23.37,110.24 24,110.87 JP36.6
  Bottom 0.254: JP36.6 JP26.6
AS1_AN7
  Bottom 0.254: R62.1 104.52,128.02 105.79,126.75 105.79,95 104.52,93.73 101.98,93.73 99.55,91.3 JP42.1
AS1_AN8
  Top 0.254: JP42.6 90.34,86.32 91.19,85.47 100.08,85.47 101.35,86.74 101.35,95 100.08,96.27 100.08,110.24 100.71,110.87 JP48.6
  Bottom 0.254: JP48.6 JP38.6
AS1_AUTOID  (via drill 0.51)
  Top 0.254: v43.69,50.04 v32.26,50.04
  Bottom 0.254: R13.2 U1.12 44.32,50.67 v43.69,50.04 | JP5.4 16.63,14.86 17.65,13.84 24.64,13.84 25.27,14.48 25.27,20.83 25.91,21.46 28.45,21.46 30.35,23.37 30.35,49.4 30.99,50.04 v32.26,50.04
AS1_AUTOID1  (via drill 0.51)
  Top 0.254: v120.4,50.04 v108.97,50.04
  Bottom 0.254: R35.2 U3.12 121.03,50.67 v120.4,50.04 | JP18.4 93.34,14.86 94.36,13.84 101.35,13.84 101.98,14.48 101.98,20.83 102.62,21.46 105.16,21.46 107.06,23.37 107.06,49.4 107.7,50.04 v108.97,50.04
AS1_AUTOID2  (via drill 0.51)
  Top 0.254: v43.69,121.67 v32.26,121.67
  Bottom 0.254: R55.2 U5.12 44.32,122.3 v43.69,121.67 | JP30.4 16.63,86.49 17.65,85.47 24.64,85.47 25.27,86.11 25.27,92.46 25.91,93.09 28.45,93.09 30.35,95 30.35,121.03 30.99,121.67 v32.26,121.67
AS1_AUTOID3  (via drill 0.51)
  Top 0.254: v120.4,121.67 v108.97,121.67
  Bottom 0.254: R75.2 U7.12 121.03,122.3 v120.4,121.67 | JP42.4 93.34,86.49 94.36,85.47 101.35,85.47 101.98,86.11 101.98,92.46 102.62,93.09 105.16,93.09 107.06,95 107.06,121.03 107.7,121.67 v108.97,121.67
AS1_VRES  (via drill 0.51)
  Top 0.254: v26.54,41.15 v40.26,41.15
  Bottom 0.254: JP5.3 18.13,20.67 18.92,21.46 21.46,21.46 21.68,21.68 R14.2 24,22.73 24.64,23.37 27.18,23.37 27.81,24 27.81,40.51 27.18,41.15 v26.54,41.15 | U1.1 v40.25,41.15 v40.26,41.15
AS1_VRES1  (via drill 0.51)
  Top 0.254: v103.25,41.15 v116.97,41.15
  Bottom 0.254: JP18.3 94.84,20.67 95.63,21.46 98.17,21.46 98.39,21.68 R33.2 100.71,22.73 101.35,23.37 103.89,23.37 104.52,24 104.52,40.51 103.89,41.15 v103.25,41.15 | U3.1 v116.96,41.15 v116.97,41.15
AS1_VRES2  (via drill 0.51)
  Top 0.254: v26.54,112.78 v40.26,112.78
  Bottom 0.254: JP30.3 18.13,92.3 18.92,93.09 21.46,93.09 21.68,93.31 R53.2 24,94.36 24.64,95 27.18,95 27.81,95.63 27.81,112.14 27.18,112.78 v26.54,112.78 | U5.1 v40.25,112.78 v40.26,112.78
AS1_VRES3  (via drill 0.51)
  Top 0.254: v103.25,112.78 v116.97,112.78
  Bottom 0.254: JP42.3 94.84,92.3 95.63,93.09 98.17,93.09 98.39,93.31 R73.2 100.71,94.36 101.35,95 103.89,95 104.52,95.63 104.52,112.14 103.89,112.78 v103.25,112.78 | U7.1 v116.96,112.78 v116.97,112.78
AS2_AN1
  Bottom 0.254: R8.1 54.48,58.29 53.85,57.66 43.69,57.66 42.42,56.39 42.42,51.31 41.15,50.04 39.12,50.04 38.61,49.53 38.61,24.64 40.18,23.06 JP6.1
AS2_AN2  (via drill 0.51)
  Top 0.254: JP12.4 v32.64,34.16
  Bottom 0.254: JP4.4 JP12.4 | v32.64,34.16 32.68,34.12 32.68,22.52 32.26,22.1 32.26,18.29 32.68,17.86 JP6.6
AS2_AN3  (via drill 0.51)
  Top 0.254: JP24.4 v109.35,34.16
  Bottom 0.254: JP14.4 JP24.4 | v109.35,34.16 109.39,34.12 109.39,22.52 108.97,22.1 108.97,18.29 109.39,17.86 JP19.6
AS2_AN4
  Bottom 0.254: R28.1 131.19,58.29 130.56,57.66 120.4,57.66 119.13,56.39 119.13,51.31 117.86,50.04 115.82,50.04 115.32,49.53 115.32,24.64 116.89,23.06 JP19.1
AS2_AN5  (via drill 0.51)
  Top 0.254: JP36.4 v32.64,105.79
  Bottom 0.254: JP26.4 JP36.4 | v32.64,105.79 32.68,105.75 32.68,94.15 32.26,93.73 32.26,89.92 32.68,89.49 JP31.6
AS2_AN6
  Bottom 0.254: R48.1 54.48,129.92 53.85,129.29 43.69,129.29 42.42,128.02 42.42,122.94 41.15,121.67 39.12,121.67 38.61,121.16 38.61,96.27 40.18,94.69 JP31.1
AS2_AN7  (via drill 0.51)
  Top 0.254: JP48.4 v109.35,105.79
  Bottom 0.254: JP38.4 JP48.4 | v109.35,105.79 109.39,105.75 109.39,94.15 108.97,93.73 108.97,89.92 109.39,89.49 JP43.6
AS2_AN8
  Bottom 0.254: R68.1 131.19,129.92 130.56,129.29 120.4,129.29 119.13,128.02 119.13,122.94 117.86,121.67 115.82,121.67 115.32,121.16 115.32,96.27 116.89,94.69 JP43.1
AS2_AUTOID  (via drill 0.51)
  Top 0.254: v48.77,48.13 48.77,25.91 47.5,24.64 43.69,24.64 42.42,23.37 42.42,14.48 41.15,13.21 37.34,13.21 35.68,14.86 JP6.4
  Bottom 0.254: R15.2 v48.77,48.13 U1.14
AS2_AUTOID1  (via drill 0.51)
  Top 0.254: v125.48,48.13 125.48,25.91 124.21,24.64 120.4,24.64 119.13,23.37 119.13,14.48 117.86,13.21 114.05,13.21 112.39,14.86 JP19.4
  Bottom 0.254: R36.2 v125.48,48.13 U3.14
AS2_AUTOID2  (via drill 0.51)
  Top 0.254: v48.77,119.76 48.77,97.54 47.5,96.27 43.69,96.27 42.42,95 42.42,86.11 41.15,84.84 37.34,84.84 35.68,86.49 JP31.4
  Bottom 0.254: R56.2 v48.77,119.76 U5.14
AS2_AUTOID3  (via drill 0.51)
  Top 0.254: v125.48,119.76 125.48,97.54 124.21,96.27 120.4,96.27 119.13,95 119.13,86.11 117.86,84.84 114.05,84.84 112.39,86.49 JP43.4
  Bottom 0.254: R76.2 v125.48,119.76 U7.14
AS2_VRES
  Bottom 0.254: U1.5 38.61,50.67 37.97,50.04 37.97,23.37 37.34,22.73 37.21,22.73 | R16.2 37.21,22.73 | JP6.3 37.18,22.7 37.21,22.73
AS2_VRES1
  Bottom 0.254: U3.5 115.32,50.67 114.68,50.04 114.68,23.37 114.05,22.73 113.92,22.73 | R34.2 113.92,22.73 | JP19.3 113.89,22.7 113.92,22.73
AS2_VRES2
  Bottom 0.254: U5.5 38.61,122.3 37.97,121.67 37.97,95 37.34,94.36 37.21,94.36 | R54.2 37.21,94.36 | JP31.3 37.18,94.33 37.21,94.36
AS2_VRES3
  Bottom 0.254: U7.5 115.32,122.3 114.68,121.67 114.68,95 114.05,94.36 113.92,94.36 | R74.2 113.92,94.36 | JP43.3 113.89,94.33 113.92,94.36
D1_IO0
  Bottom 0.254: JP7.1 49.12,16.67 47.5,18.29 47.5,30.35 49.4,32.26 62.74,32.26 63.37,31.62 JP2.3
D1_IO1  (via drill 0.51)
  Top 0.254: v51.31,33.53 51.31,19.74 JP7.2
  Bottom 0.254: U1.2 41.78,46.86 42.36,46.29 42.36,34.55 43.38,33.53 v51.31,33.53 63.37,33.53 64.01,34.16 JP2.4
D1_IO2  (via drill 0.51)
  Top 0.254: v51.05,44.32 54.48,44.32 55.12,43.69 v55.12,34.8 55.12,25.27 55.75,24.64 v59.56,24.64
  Bottom 0.254: U1.15 R17.2 51.09,44.36 v51.05,44.32 | v55.12,34.8 62.1,34.8 64.01,36.7 JP2.5 | v59.56,24.64 59.56,14.48 58.29,13.21 53.85,13.21 52.73,14.32 JP7.3
D1_IO3  (via drill 0.51)
  Top 0.254: v61.47,30.99 61.47,38.61 62.1,39.24 v62.74,39.24
  Bottom 0.254: v62.74,39.24 JP2.6 | v61.47,30.99 57.78,30.99 57.23,30.44 JP7.6
D1_IO4  (via drill 0.51)
  Top 0.254: v138.18,30.99 138.18,38.61 138.81,39.24 v139.45,39.24
  Bottom 0.254: v139.45,39.24 JP16.6 | v138.18,30.99 134.49,30.99 133.94,30.44 JP17.6
D1_IO5  (via drill 0.51)
  Top 0.254: v127.76,44.32 131.19,44.32 131.83,43.69 v131.83,34.8 131.83,25.27 132.46,24.64 v136.27,24.64
  Bottom 0.254: U3.15 R37.2 127.8,44.36 v127.76,44.32 | v131.83,34.8 138.81,34.8 140.72,36.7 JP16.5 | v136.27,24.64 136.27,14.48 135,13.21 130.56,13.21 129.44,14.32 JP17.3
D1_IO6  (via drill 0.51)
  Top 0.254: v128.02,33.53 128.02,19.74 JP17.2
  Bottom 0.254: U3.2 118.49,46.86 119.07,46.29 119.07,34.55 120.09,33.53 v128.02,33.53 140.08,33.53 140.72,34.16 JP16.4
D1_IO7
  Bottom 0.254: JP17.1 125.83,16.67 124.21,18.29 124.21,30.35 126.11,32.26 139.45,32.26 140.08,31.62 JP16.3
D1_IO8  (via drill 0.51)
  Top 0.254: v61.47,102.62 61.47,110.24 62.1,110.87 v62.74,110.87
  Bottom 0.254: v62.74,110.87 JP28.6 | v61.47,102.62 57.78,102.62 57.23,102.06 JP29.6
D1_IO9  (via drill 0.51)
  Top 0.254: v51.05,115.95 54.48,115.95 55.12,115.32 v55.12,106.43 55.12,96.9 55.75,96.27 v59.56,96.27
  Bottom 0.254: U5.15 R57.2 51.09,115.99 v51.05,115.95 | v55.12,106.43 62.1,106.43 64.01,108.33 JP28.5 | v59.56,96.27 59.56,86.11 58.29,84.84 53.85,84.84 52.73,85.95 JP29.3
D1_IO10  (via drill 0.51)
  Top 0.254: v51.31,105.16 51.31,91.37 JP29.2
  Bottom 0.254: U5.2 41.78,118.49 42.36,117.92 42.36,106.18 43.38,105.16 v51.31,105.16 63.37,105.16 64.01,105.79 JP28.4
D1_IO11
  Bottom 0.254: JP29.1 49.12,88.3 47.5,89.92 47.5,101.98 49.4,103.89 62.74,103.89 63.37,103.25 JP28.3
D1_IO12  (via drill 0.51)
  Top 0.254: v138.18,102.62 138.18,110.24 138.81,110.87 v139.45,110.87
  Bottom 0.254: v139.45,110.87 JP40.6 | v138.18,102.62 134.49,102.62 133.94,102.06 JP41.6
D1_IO13  (via drill 0.51)
  Top 0.254: v127.76,115.95 131.19,115.95 131.83,115.32 v131.83,106.43 131.83,96.9 132.46,96.27 v136.27,96.27
  Bottom 0.254: U7.15 R77.2 127.8,115.99 v127.76,115.95 | v131.83,106.43 138.81,106.43 140.72,108.33 JP40.5 | v136.27,96.27 136.27,86.11 135,84.84 130.56,84.84 129.44,85.95 JP41.3
D1_IO14  (via drill 0.51)
  Top 0.254: v128.02,105.16 128.02,91.37 JP41.2
  Bottom 0.254: U7.2 118.49,118.49 119.07,117.92 119.07,106.18 120.09,105.16 v128.02,105.16 140.08,105.16 140.72,105.79 JP40.4
D1_IO15
  Bottom 0.254: JP41.1 125.83,88.3 124.21,89.92 124.21,101.98 126.11,103.89 139.45,103.89 140.08,103.25 JP40.3
D2_IO0  (via drill 0.51)
  Top 0.254: v61.47,24.64 61.47,25.27 60.2,26.54 60.2,41.15 60.83,41.78 v62.74,41.78
  Bottom 0.254: JP2.7 v62.74,41.78 | JP8.1 63.09,16.67 61.47,18.29 v61.47,24.64
D2_IO1  (via drill 0.51)
  Top 0.254: v67.82,24.64 67.82,43.81 67.31,44.32 v62.74,44.32
  Bottom 0.254: JP8.2 68.98,19.67 67.82,20.83 v67.82,24.64 | U1.4 43.05,49.4 43.69,48.77 43.69,39.88 44.96,38.61 56.39,38.61 57.66,39.88 57.66,43.69 58.29,44.32 v62.74,44.32 JP2.8
D2_IO2  (via drill 0.51)
  Top 0.254: JP8.3 71.78,14.32 72.9,13.21 76.71,13.21 77.98,14.48 77.98,21.46 76.71,22.73 72.9,22.73 70.99,24.64 70.99,46.86 69.72,48.13 v62.74,48.13 54.48,48.13 53.85,48.77 v53.85,54.48
  Bottom 0.254: U1.11 R18.2 51.09,53.63 51.94,54.48 v53.85,54.48 | JP1.1 v62.74,48.13
D2_IO3  (via drill 0.51)
  Top 0.254: v62.74,46.23 69.09,46.23 69.72,45.59 69.72,24.64 72.26,22.1 75.44,22.1 76.28,21.25 JP8.6
  Bottom 0.254: JP1.2 61.47,50.67 60.83,50.04 60.83,46.86 61.47,46.23 v62.74,46.23
D2_IO4  (via drill 0.51)
  Top 0.254: v139.45,46.23 145.8,46.23 146.43,45.59 146.43,24.64 148.97,22.1 152.15,22.1 152.99,21.25 JP20.6
  Bottom 0.254: JP13.2 138.18,50.67 137.54,50.04 137.54,46.86 138.18,46.23 v139.45,46.23
D2_IO5  (via drill 0.51)
  Top 0.254: JP20.3 148.49,14.32 149.61,13.21 153.42,13.21 154.69,14.48 154.69,21.46 153.42,22.73 149.61,22.73 147.7,24.64 147.7,46.86 146.43,48.13 v139.45,48.13 131.19,48.13 130.56,48.77 v130.56,54.48
  Bottom 0.254: U3.11 R38.2 127.8,53.63 128.65,54.48 v130.56,54.48 | JP13.1 v139.45,48.13
D2_IO6  (via drill 0.51)
  Top 0.254: v144.53,24.64 144.53,43.81 144.02,44.32 v139.45,44.32
  Bottom 0.254: JP20.2 145.69,19.67 144.53,20.83 v144.53,24.64 | U3.4 119.76,49.4 120.4,48.77 120.4,39.88 121.67,38.61 133.1,38.61 134.37,39.88 134.37,43.69 135,44.32 v139.45,44.32 JP16.8
D2_IO7  (via drill 0.51)
  Top 0.254: v138.18,24.64 138.18,25.27 136.91,26.54 136.91,41.15 137.54,41.78 v139.45,41.78
  Bottom 0.254: JP16.7 v139.45,41.78 | JP20.1 139.8,16.67 138.18,18.29 v138.18,24.64
D2_IO8  (via drill 0.51)
  Top 0.254: v62.74,117.86 69.09,117.86 69.72,117.22 69.72,96.27 72.26,93.73 75.44,93.73 76.28,92.88 JP32.6
  Bottom 0.254: JP25.2 61.47,122.3 60.83,121.67 60.83,118.49 61.47,117.86 v62.74,117.86
D2_IO9  (via drill 0.51)
  Top 0.254: JP32.3 71.78,85.95 72.9,84.84 76.71,84.84 77.98,86.11 77.98,93.09 76.71,94.36 72.9,94.36 70.99,96.27 70.99,118.49 69.72,119.76 v62.74,119.76 54.48,119.76 53.85,120.4 v53.85,126.11
  Bottom 0.254: U5.11 R58.2 51.09,125.26 51.94,126.11 v53.85,126.11 | JP25.1 v62.74,119.76
D2_IO10  (via drill 0.51)
  Top 0.254: v67.82,96.27 67.82,115.44 67.31,115.95 v62.74,115.95
  Bottom 0.254: JP32.2 68.98,91.3 67.82,92.46 v67.82,96.27 | U5.4 43.05,121.03 43.69,120.4 43.69,111.51 44.96,110.24 56.39,110.24 57.66,111.51 57.66,115.32 58.29,115.95 v62.74,115.95 JP28.8
D2_IO11  (via drill 0.51)
  Top 0.254: v61.47,96.27 61.47,96.9 60.2,98.17 60.2,112.78 60.83,113.41 v62.74,113.41
  Bottom 0.254: JP28.7 v62.74,113.41 | JP32.1 63.09,88.3 61.47,89.92 v61.47,96.27
D2_IO12  (via drill 0.51)
  Top 0.254: v139.45,117.86 145.8,117.86 146.43,117.22 146.43,96.27 148.97,93.73 152.15,93.73 152.99,92.88 JP44.6
  Bottom 0.254: JP37.2 138.18,122.3 137.54,121.67 137.54,118.49 138.18,117.86 v139.45,117.86
D2_IO13  (via drill 0.51)
  Top 0.254: JP44.3 148.49,85.95 149.61,84.84 153.42,84.84 154.69,86.11 154.69,93.09 153.42,94.36 149.61,94.36 147.7,96.27 147.7,118.49 146.43,119.76 v139.45,119.76 131.19,119.76 130.56,120.4 v130.56,126.11
  Bottom 0.254: U7.11 R78.2 127.8,125.26 128.65,126.11 v130.56,126.11 | JP37.1 v139.45,119.76
D2_IO14  (via drill 0.51)
  Top 0.254: v144.53,96.27 144.53,115.44 144.02,115.95 v139.45,115.95
  Bottom 0.254: JP44.2 145.69,91.3 144.53,92.46 v144.53,96.27 | U7.4 119.76,121.03 120.4,120.4 120.4,111.51 121.67,110.24 133.1,110.24 134.37,111.51 134.37,115.32 135,115.95 v139.45,115.95 JP40.8
D2_IO15  (via drill 0.51)
  Top 0.254: v138.18,96.27 138.18,96.9 136.91,98.17 136.91,112.78 137.54,113.41 v139.45,113.41
  Bottom 0.254: JP40.7 v139.45,113.41 | JP44.1 139.8,88.3 138.18,89.92 v138.18,96.27
GND  (via drill 0.51)
  other vias: 50.16,39.88 50.04,63.37 39.88,56.39 44.96,37.34
  pour Bottom (isolate 0.305): 17.02,75.44 19.56,77.98 70.36,77.98 72.9,75.44 72.9,25.91 74.17,24.64 81.79,24.64 83.06,23.37 83.06,8.13 81.79,6.86 8.13,6.86 6.99,8 6.86,8 6.86,23.37 8.13,24.64 15.75,24.64 17.02,25.91
  pour Top (isolate 0.305): 17.02,75.44 19.56,77.98 70.36,77.98 72.9,75.44 72.9,25.91 74.17,24.64 81.79,24.64 83.06,23.37 83.06,8.13 81.79,6.86 8.13,6.86 8.28,6.88 8.13,6.88 6.86,8.03 6.86,23.37 8.13,24.64 15.75,24.64 17.02,25.91
GND1  (via drill 0.51)
  other vias: 126.87,39.88 126.75,63.37 116.59,56.39 121.67,37.34
  pour Bottom (isolate 0.305): 93.73,75.44 96.27,77.98 147.07,77.98 149.61,75.44 149.61,25.91 150.88,24.64 158.5,24.64 159.77,23.37 159.77,8.13 158.5,6.86 84.84,6.86 83.69,8 83.57,8 83.57,23.37 84.84,24.64 92.46,24.64 93.73,25.91
  pour Top (isolate 0.305): 93.73,75.44 96.27,77.98 147.07,77.98 149.61,75.44 149.61,25.91 150.88,24.64 158.5,24.64 159.77,23.37 159.77,8.13 158.5,6.86 84.84,6.86 84.99,6.88 84.84,6.88 83.57,8.03 83.57,23.37 84.84,24.64 92.46,24.64 93.73,25.91
GND2  (via drill 0.51)
  other vias: 50.16,111.51 50.04,135 39.88,128.02 44.96,108.97
  pour Bottom (isolate 0.305): 17.02,147.07 19.56,149.61 70.36,149.61 72.9,147.07 72.9,97.54 74.17,96.27 81.79,96.27 83.06,95 83.06,79.76 81.79,78.49 8.13,78.49 6.99,79.63 6.86,79.63 6.86,95 8.13,96.27 15.75,96.27 17.02,97.54
  pour Top (isolate 0.305): 17.02,147.07 19.56,149.61 70.36,149.61 72.9,147.07 72.9,97.54 74.17,96.27 81.79,96.27 83.06,95 83.06,79.76 81.79,78.49 8.13,78.49 8.28,78.51 8.13,78.51 6.86,79.65 6.86,95 8.13,96.27 15.75,96.27 17.02,97.54
GND3  (via drill 0.51)
  other vias: 126.87,111.51 126.75,135 116.59,128.02 121.67,108.97
  pour Bottom (isolate 0.305): 93.73,147.07 96.27,149.61 147.07,149.61 149.61,147.07 149.61,97.54 150.88,96.27 158.5,96.27 159.77,95 159.77,79.76 158.5,78.49 84.84,78.49 83.69,79.63 83.57,79.63 83.57,95 84.84,96.27 92.46,96.27 93.73,97.54
  pour Top (isolate 0.305): 93.73,147.07 96.27,149.61 147.07,149.61 149.61,147.07 149.61,97.54 150.88,96.27 158.5,96.27 159.77,95 159.77,79.76 158.5,78.49 84.84,78.49 84.99,78.51 84.84,78.51 83.57,79.65 83.57,95 84.84,96.27 92.46,96.27 93.73,97.54
MUX_A0
  Bottom 0.254: U1.10 48.77,53.21 49.4,53.85 49.4,55.12 50.04,55.75 61.47,55.75 62.1,55.12 62.1,53.85 62.74,53.21 JP1.3
MUX_A1
  Bottom 0.254: U1.9 47.5,54.48 48.13,55.12 48.13,55.75 48.77,56.39 62.74,56.39 63.37,55.75 JP1.4
MUX_A2
  Bottom 0.254: U3.10 125.48,53.21 126.11,53.85 126.11,55.12 126.75,55.75 138.18,55.75 138.81,55.12 138.81,53.85 139.45,53.21 JP13.3
MUX_A3
  Bottom 0.254: U3.9 124.21,54.48 124.84,55.12 124.84,55.75 125.48,56.39 139.45,56.39 140.08,55.75 JP13.4
MUX_A4
  Bottom 0.254: U5.10 48.77,124.84 49.4,125.48 49.4,126.75 50.04,127.38 61.47,127.38 62.1,126.75 62.1,125.48 62.74,124.84 JP25.3
MUX_A5
  Bottom 0.254: U5.9 47.5,126.11 48.13,126.75 48.13,127.38 48.77,128.02 62.74,128.02 63.37,127.38 JP25.4
MUX_A6
  Bottom 0.254: U7.10 125.48,124.84 126.11,125.48 126.11,126.75 126.75,127.38 138.18,127.38 138.81,126.75 138.81,125.48 139.45,124.84 JP37.3
MUX_A7
  Bottom 0.254: U7.9 124.21,126.11 124.84,126.75 124.84,127.38 125.48,128.02 139.45,128.02 140.08,127.38 JP37.4
N$1
  Bottom 0.254: R2.2 R6.1 R1.2 33.11,65.49 34.8,67.18 37.34,67.18 37.97,66.55 U2.3
N$2
  Bottom 0.254: R4.1 R3.2
N$3
  Bottom 0.254: R4.2 R5.1 38.39,65.49 38.61,65.28 U2.2
N$4
  Bottom 0.254: R24.1 R23.2
N$5
  Bottom 0.254: R9.2 R10.1
N$6
  Bottom 0.254: U2.5 47.5,67.82 48.77,69.09 53.85,69.09 54.48,68.45 R8.2 R12.1 R7.2
N$8
  Bottom 0.254: U2.6 47.5,66.55 47.71,66.76 R11.1 R10.2
N$9
  Bottom 0.254: LED1.K R19.2
N$24
  Bottom 0.254: R22.2 R26.1 R21.2 109.82,65.49 111.51,67.18 114.05,67.18 114.68,66.55 U4.3
N$25
  Bottom 0.254: R24.2 R25.1 115.1,65.49 115.32,65.28 U4.2
N$26
  Bottom 0.254: R29.2 R30.1
N$28
  Bottom 0.254: U4.5 124.21,67.82 125.48,69.09 130.56,69.09 131.19,68.45 R28.2 R32.1 R27.2
N$29
  Bottom 0.254: U4.6 124.21,66.55 124.42,66.76 R31.1 R30.2
N$30
  Bottom 0.254: LED2.K R39.2
N$31
  Bottom 0.254: R44.1 R43.2
N$32
  Bottom 0.254: R42.2 R46.1 R41.2 33.11,137.12 34.8,138.81 37.34,138.81 37.97,138.18 U6.3
N$33
  Bottom 0.254: R44.2 R45.1 38.39,137.12 38.61,136.91 U6.2
N$34
  Bottom 0.254: R49.2 R50.1
N$35
  Bottom 0.254: U6.5 47.5,139.45 48.77,140.72 53.85,140.72 54.48,140.08 R48.2 R52.1 R47.2
N$36
  Bottom 0.254: U6.6 47.5,138.18 47.71,138.39 R51.1 R50.2
N$37
  Bottom 0.254: LED3.K R59.2
N$38
  Bottom 0.254: R64.1 R63.2
N$39
  Bottom 0.254: R62.2 R66.1 R61.2 109.82,137.12 111.51,138.81 114.05,138.81 114.68,138.18 U8.3
N$40
  Bottom 0.254: R64.2 R65.1 115.1,137.12 115.32,136.91 U8.2
N$41
  Bottom 0.254: R69.2 R70.1
N$42
  Bottom 0.254: U8.5 124.21,139.45 125.48,140.72 130.56,140.72 131.19,140.08 R68.2 R72.1 R67.2
N$43
  Bottom 0.254: U8.6 124.21,138.18 124.42,138.39 R71.1 R70.2
N$44
  Bottom 0.254: LED4.K R79.2
RESET
  Bottom 0.254: JP3.6 24,57.02 24.64,57.66 24.64,65.53 | 24.64,65.53 24.64,75.44 25.63,76.43 S3.3 | R20.1 24.68,65.49 24.64,65.53
RESET1
  Bottom 0.254: JP15.6 100.71,57.02 101.35,57.66 101.35,65.53 | 101.35,65.53 101.35,75.44 102.34,76.43 S1.3 | R40.1 101.39,65.49 101.35,65.53
RESET2
  Bottom 0.254: JP27.6 24,128.65 24.64,129.29 24.64,137.16 | 24.64,137.16 24.64,147.07 25.63,148.06 S5.3 | R60.1 24.68,137.12 24.64,137.16
RESET3
  Bottom 0.254: JP39.6 100.71,128.65 101.35,129.29 101.35,137.16 | 101.35,137.16 101.35,147.07 102.34,148.06 S7.3 | R80.1 101.39,137.12 101.35,137.16

## Text on the board
Bottom: v12 | v12 | v12 | v12
Dimension: Route Out | Route Out | Route Out | Route Out | Route Out | Route Out | Route Out | Route Out | Route Out | Route Out | Route Out | Route Out | Route Out | Route Out | Route Out | Route Out | Route Out
tPlace: RESET | D12 | D13 | RESET | D12 | D13 | Arduino to Vernier Pin-out | Arduino to Vernier Pin-out | GND | GND | D13 | D13 | D12 | D12 | Vernier Sensor / Interface Shield | Vernier Sensor / Interface Shield | 5V | 5V | ANALOG 1 / MUX ADDR 00 / 0-5V / +/-10V / V_RES / IDEN | -> A0 / -> A1 / -> A4 / -> A5 | DIGITAL 1 / MUX ADDR 10 / IO0 -> D2 / IO1 -> D3/A4 / IO2 -> D4/A5 / IO3 -> D5 | ANALOG 1 / MUX ADDR 00 / 0-5V / +/-10V / V_RES / IDEN | -> A0 / -> A1 / -> A4 / -> A5 | DIGITAL 1 / MUX ADDR 10 / IO0 -> D2 / IO1 -> D3/A4 / IO2 -> D4/A5 / IO3 -> D5 | GND | GND | GND | GND | A0 | A0 | A1 | A1 | ANALOG 2 / MUX ADDR 01 / 0-5V / +/-10V / V_RES / IDEN | -> A2 / -> A3 / -> A4 / -> A5 | DIGITAL 2 / MUX ADDR 11 / IO0 -> D6 / IO1 -> D7/A4 / IO2 -> D8/A5 / IO3 -> D9 | ANALOG 2 / MUX ADDR 01 / 0-5V / +/-10V / V_RES / IDEN | -> A2 / -> A3 / -> A4 / -> A5 | DIGITAL 2 / MUX ADDR 11 / IO0 -> D6 / IO1 -> D7/A4 / IO2 -> D8/A5 / IO3 -> D9 | A2 | A2 | A3 | A3 | A4 | D1 | A4 | D1 | A5 | D0 | A5 | D0 | MUX ADDR PINS / LSB -> D10 / MSB -> D11 | MUX ADDR PINS / LSB -> D10 / MSB -> D11 | ANALOG 1 | ANALOG 2 | DIGITAL 1 | DIGITAL 2 | ANALOG 1 | ANALOG 2 | DIGITAL 1 | DIGITAL 2 | RESET | D12 | D13 | RESET | D12 | D13 | Arduino to Vernier Pin-out | Arduino to Vernier Pin-out | GND | GND | D13 | D13 | D12 | D12 | Vernier Sensor / Interface Shield | Vernier Sensor / Interface Shield | 5V | 5V | ANALOG 1 / MUX ADDR 00 / 0-5V / +/-10V / V_RES / IDEN | -> A0 / -> A1 / -> A4 / -> A5 | DIGITAL 1 / MUX ADDR 10 / IO0 -> D2 / IO1 -> D3/A4 / IO2 -> D4/A5 / IO3 -> D5 | ANALOG 1 / MUX ADDR 00 / 0-5V / +/-10V / V_RES / IDEN | -> A0 / -> A1 / -> A4 / -> A5 | DIGITAL 1 / MUX ADDR 10 / IO0 -> D2 / IO1 -> D3/A4 / IO2 -> D4/A5 / IO3 -> D5 | GND | GND | GND | GND | A0 | A0 | A1 | A1 | ANALOG 2 / MUX ADDR 01 / 0-5V / +/-10V / V_RES / IDEN | -> A2 / -> A3 / -> A4 / -> A5 | DIGITAL 2 / MUX ADDR 11 / IO0 -> D6 / IO1 -> D7/A4 / IO2 -> D8/A5 / IO3 -> D9 | ANALOG 2 / MUX ADDR 01 / 0-5V / +/-10V / V_RES / IDEN | -> A2 / -> A3 / -> A4 / -> A5 | DIGITAL 2 / MUX ADDR 11 / IO0 -> D6 / IO1 -> D7/A4 / IO2 -> D8/A5 / IO3 -> D9 | A2 | A2 | A3 | A3 | A4 | D1 | A4 | D1 | A5 | D0 | A5 | D0 | MUX ADDR PINS / LSB -> D10 / MSB -> D11 | MUX ADDR PINS / LSB -> D10 / MSB -> D11 | ANALOG 1 | ANALOG 2 | DIGITAL 1 | DIGITAL 2 | ANALOG 1 | ANALOG 2 | DIGITAL 1 | DIGITAL 2
bPlace: SCL | SCL | SDA | SDA | AREF | AREF | GND | GND | D13 | D13 | IOREF | IOREF | D12 | D12 | RST | RST | D11 | D11 | 3.3V | 3.3V | D10 | D10 | 5V | 5V | D9 | D9 | GND | GND | D8 | D8 | GND | GND | VIN | D7 | VIN | D7 | D6 | D6 | A0 | D5 | A0 | D5 | A1 | D4 | A1 | D4 | A2 | D3 | A2 | D3 | A3 | D2 | A3 | D2 | A4 | D1 | A4 | D1 | A5 | D0 | A5 | D0 | SCL | SCL | SDA | SDA | AREF | AREF | GND | GND | D13 | D13 | IOREF | IOREF | D12 | D12 | RST | RST | D11 | D11 | 3.3V | 3.3V | D10 | D10 | 5V | 5V | D9 | D9 | GND | GND | D8 | D8 | GND | GND | VIN | D7 | VIN | D7 | D6 | D6 | A0 | D5 | A0 | D5 | A1 | D4 | A1 | D4 | A2 | D3 | A2 | D3 | A3 | D2 | A3 | D2 | A4 | D1 | A4 | D1 | A5 | D0 | A5 | D0